# Altium PCB PCB1.PcbDoc
Units mil, origin at the board's own origin, x right, y up, seen from the top; angles counter-clockwise.
Board outline 1045 x 2725 mil, 4 copper layers (Top Layer, Int1 (GND), Int2 (PWR), Bottom Layer), stack 53.912 mil thick; 31 components, 28 nets, 146 pads, 555 vias.
Unrouted connection lines stored in the file: 30.
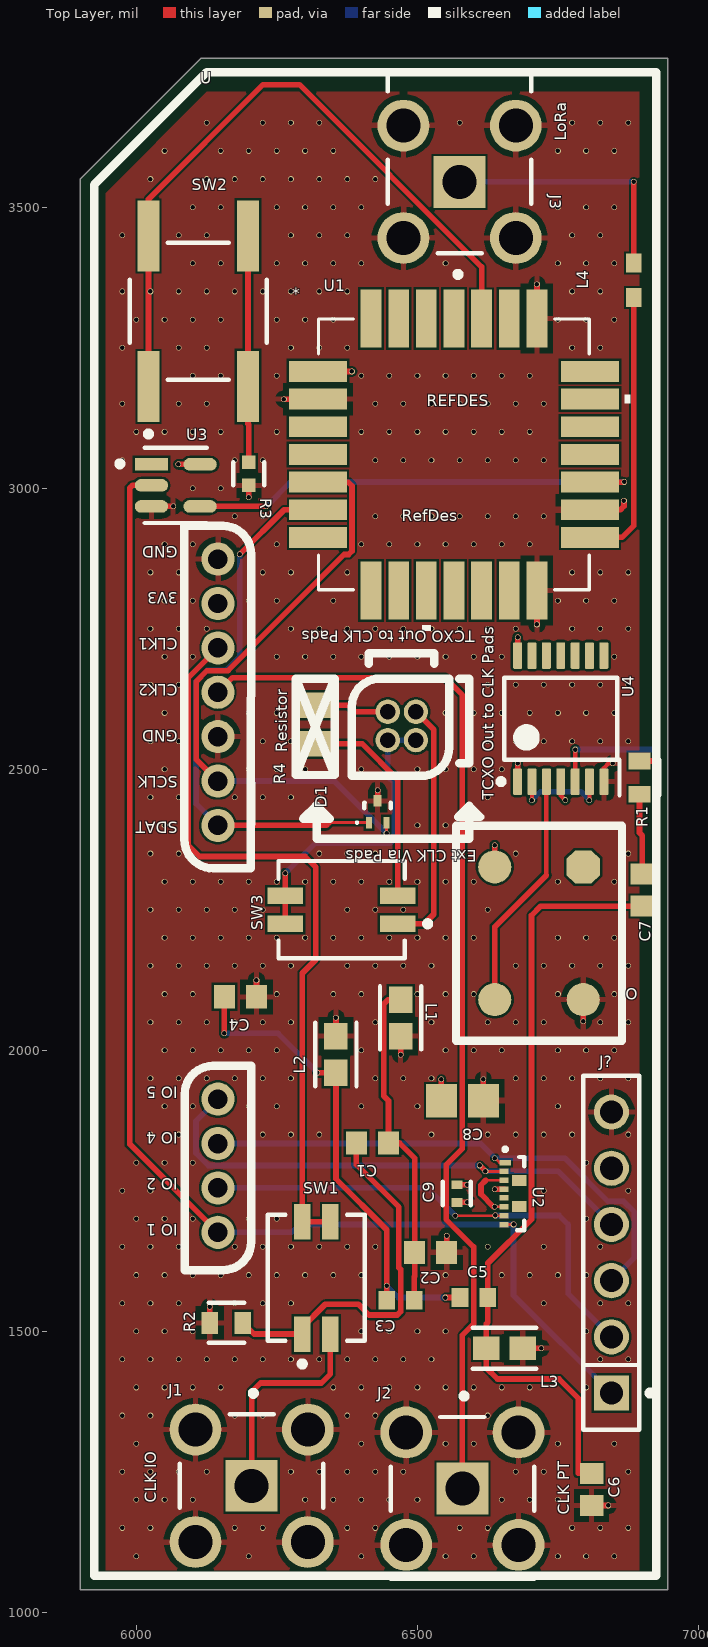
[diagram p0: Top Layer view]
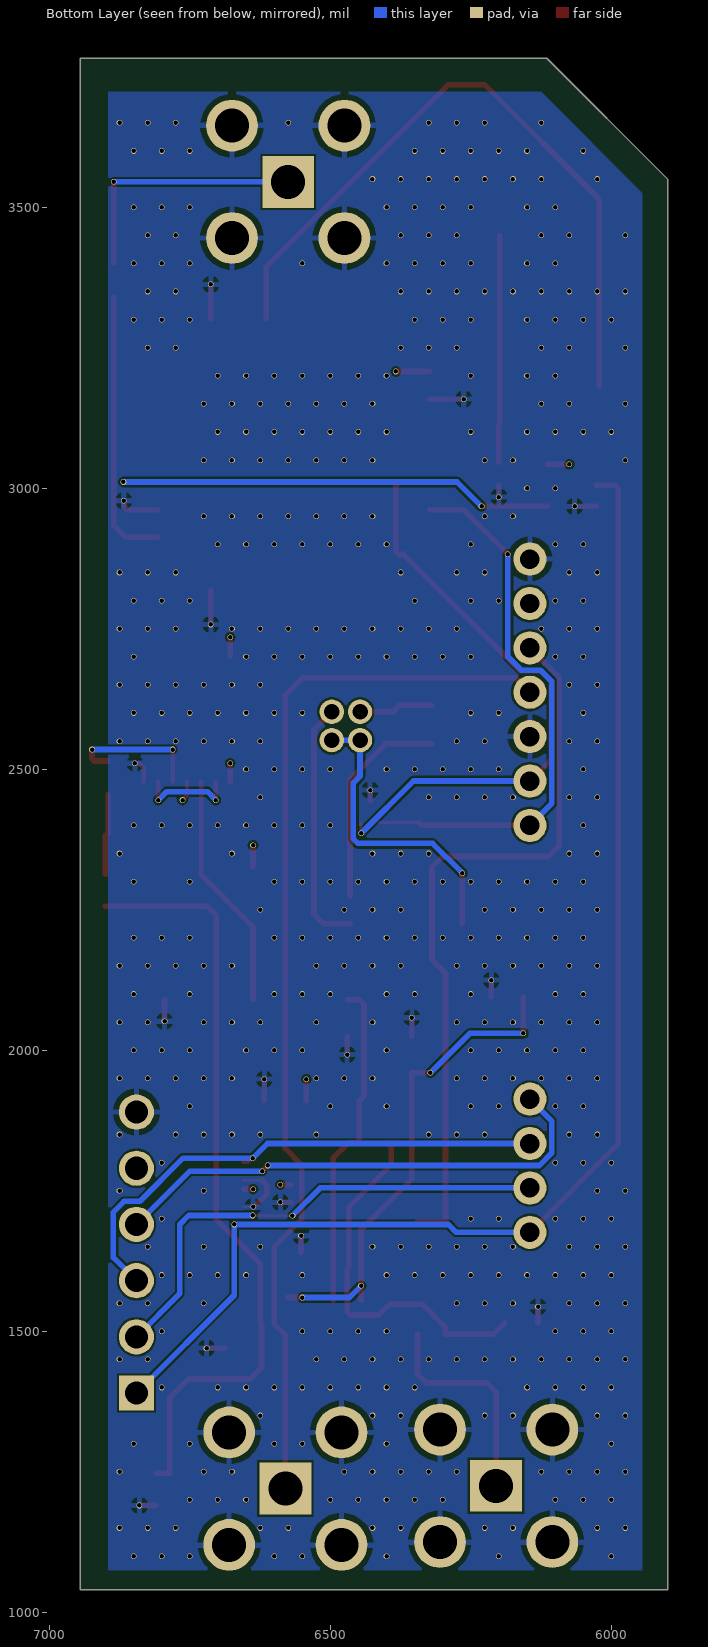
[diagram p1: Bottom Layer view, seen from below]
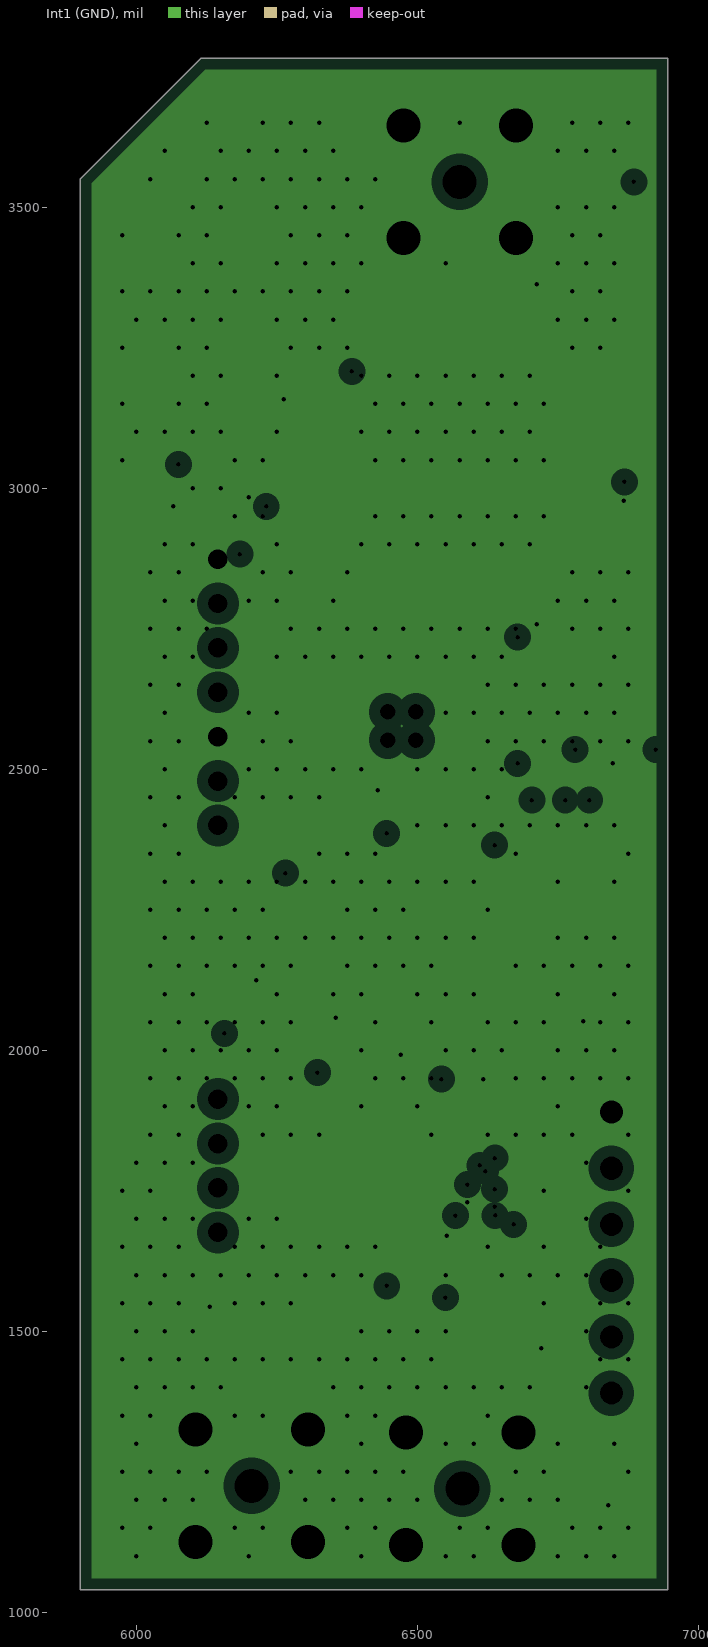
[diagram p2: Int1 (GND), clearances drawn from the general rule]
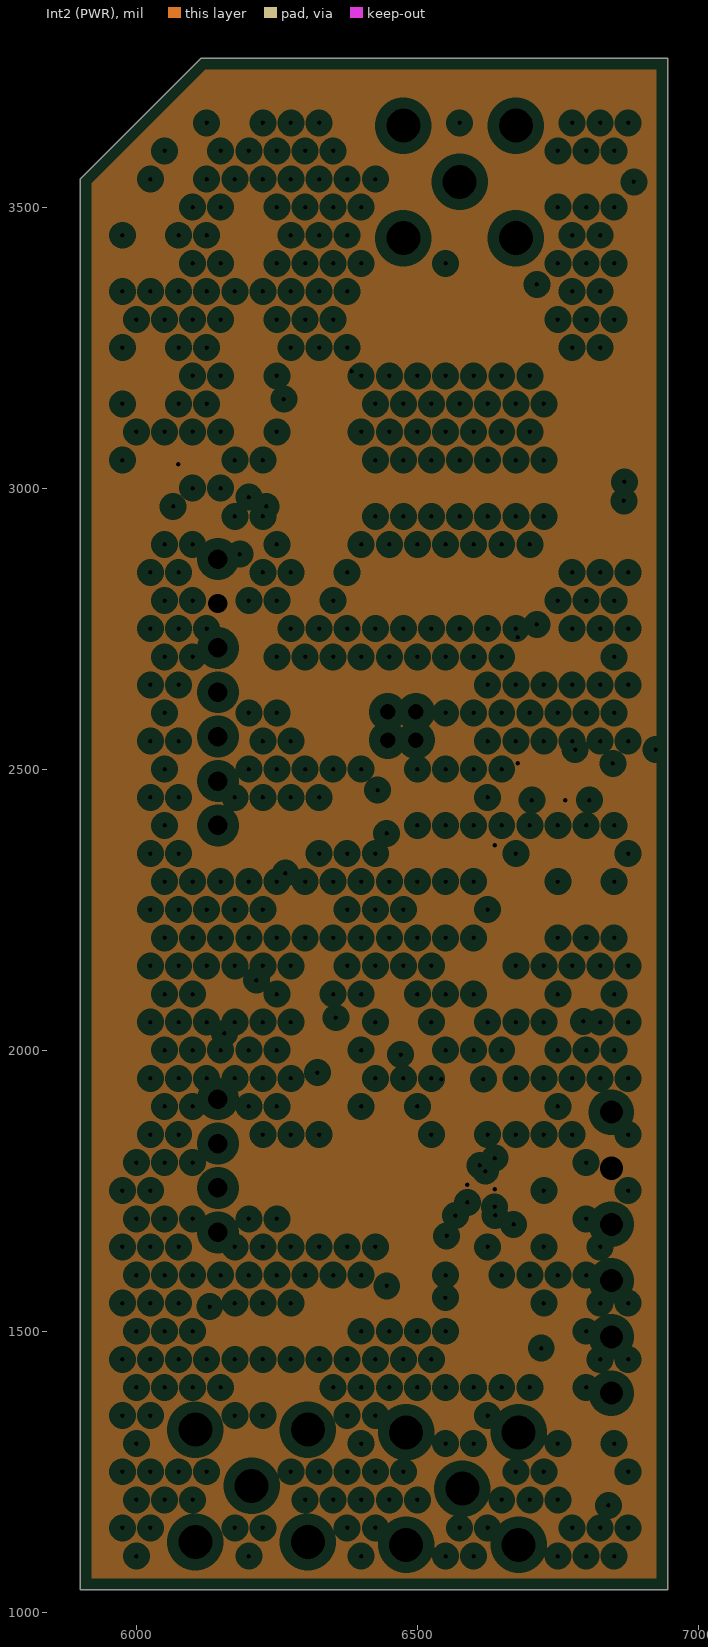
[diagram p3: Int2 (PWR), clearances drawn from the general rule]
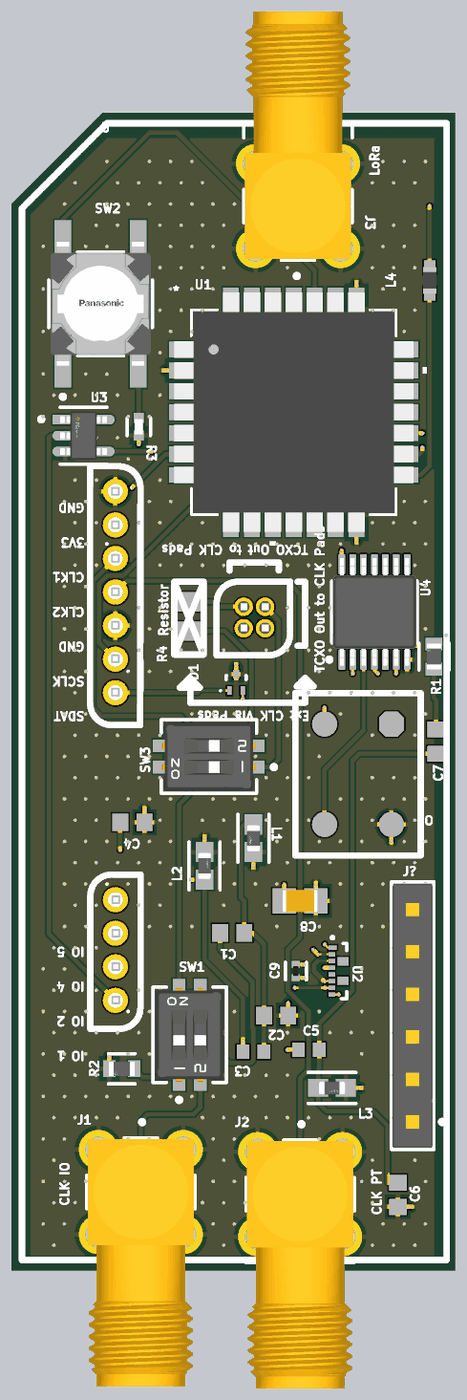
[diagram p4: 3D render of the assembled board from above, using the file's embedded part models]

## Layer stack, top to bottom
Top Solder: solder mask 1, SM-001, Dk 4
Top Layer: signal copper 1.378
Dielectric 1: prepreg 5.1, PP-017, Dk 4.3
Dielectric 2: prepreg 5.1, PP-017, Dk 4.3
Int1 (GND): plane copper 1.378, net GND
Dielectric 3: core 28, Core-039, Dk 4.8
Int2 (PWR): plane copper 1.378, net NetC8_2
Dielectric 4: prepreg 5.1, PP-017, Dk 4.3
Dielectric 5: prepreg 5.1, PP-017, Dk 4.3
Bottom Layer: signal copper 1.378
Bottom Solder: solder mask 1, SM-001, Dk 4

## Board outline
5900,1040 6945,1040 6945,3765 6115,3765 5900,3550

## Design rules (kind name [scope] priority, off if disabled: settings)
Clearance [All] p1: gap=4 ignorepadtopadclearanceinfootprint=TRUE
PlaneClearance [All] p1: clearance=20
PlaneConnect [All] p1: planeconnectstyle=Relief reliefexpansion=20 reliefentries=4 reliefconductorwidth=10 reliefairgap=10
PolygonConnect [All] p1: connectstyle=Relief reliefconductorwidth=10 reliefentries=4 polygonreliefangle="90 Angle" airgapwidth=10
RoutingVias [All] p1: holewidth=8 width=10 viastyle="Through Hole" minholewidth=8 minwidth=10 maxholewidth=8 maxwidth=10
SMDNeckDown [All] p1: percent=50.000
SolderMaskExpansion [All] p1: expansion=4 istentingtop=FALSE
SupplyNets "Schematic Supply Nets" [InNet('GND')] p1: voltage=0.000
Width [All] p1: maxlimit=10 minlimit=4 preferedwidth=10
28 further rules are at their usual default settings.

## Components (designator, comment, footprint, x,y, rotation, side; value= is the part's Value field where it differs from the comment)
C1 "GRM1885C1H470JA01D" CAPC1608X90X35ML10T15 6420,1835 r180 top
C2 "GRM1885C1H150JA01D" CAPC1608X90X35ML10T15 6523.54,1640 r180 top
C3 "GRM1885C1H100JA01D" CAPC1608X90X35LL10T15 6470,1555 r180 top
C4 "GRM1885C1H470JA01D" CAPC1608X90X35ML10T15 6185,2095 r180 top
C5 "GRM1885C1H100JA01D" CAPC1608X90X35LL10T15 6600.39,1560 r0 top
C6 "GRM1885C1H150JA01D" CAPC1608X90X35ML10T15 6810,1218.54 r90 top
C7 "GRM1885C1H470JA01D" CAPC1608X90X35ML10T15 6900,2285 r90 top
C8 "GRM21BR61C475KA88L" CAPC2013X135X45LL10T25 6580,1910 r180 top
C9 "GRM155R71C104KA88D" FP-GRM15-MFG 6570,1745 r90 top value=0.10μF
D1 "UESD3.3DT5G" ONSC-SOT-723-3-631AA-01_V 6429.25,2424.29 r90 top
J1 "CLK IO" FP-73391-0083-MFG 6205,1058.46 r90 top
J2 "CLK PT" FP-73391-0083-MFG 6580,1053.46 r90 top
J3 "LoRa" FP-73391-0083-MFG 6575,3711.54 r270 top
J? "SSW-106-02-F-S" FP-SSW-106-02-F-S-MFG 6845,1640 r90 top
L1 "LQM18NNR47K00D" FP-LQM18NN_00-IPC_A 6470,2057.51 r270 top
L2 "LQM18NNR47K00D" FP-LQM18NN_00-IPC_A 6355,1992.51 r90 top
L3 "LQM18NNR47K00D" FP-LQM18NN_00-IPC_A 6655,1470 r0 top
L4 "742792605" SMD-0603 6885,3370 r90 top
O "AOC97FAJC-19.2000T" AOC97FAJC-19.2000T 6568.62,2399.06 r270 top
R1 "CRCW060351R0FKEA" FP-CRCW0603-e3-MFG 6895,2485 r90 top
R2 "CRCW060351R0FKEA" FP-CRCW0603-e3-MFG 6160,1515 r180 top
R3 "CRCW0402470RFKED" FP-CRCW0402-e3-MFG 6200,3025.67 r270 top
R4 "ERJ-6GEY0R00V" RESC2013X70X40NL20T20 6320,2579.45 r270 top
SW1 "CHS-02TA" FP-CHS-02TA-MFG 6320,1595 r0 top
SW2 "EVQ-P1905M" FP-EVQ-P1905M-MFG 6110,3315 r0 top
SW3 "CHS-02TA" FP-CHS-02TA-MFG 6365,2250 r90 top
U "RTL-SDRV3" "RTLSDR V3" 6929.45,1038.94 r90 top locked
U1 "317990687" QFN_90687_SEE 6565,3060 r0 top
U2 "SZESD7016MUTAG" ONSC-UDFN-8-517CB_V 6670,1745 r270 top
U3 "SN74LV1T34DBVR" FP-DBV0005A-IPC_B 6070,3005 r0 top
U4 "SN74AC74PWR" PW0014A_L 6755,2590 r90 top

## Footprints (in the part's own frame and the unit in brackets; to place one, negate y for a bottom-side part, rotate by r counter-clockwise, add the part's x,y. Pads: shape width x height; smd on the part's side, far side on the other; paste and mask are expansions set on the pad)
AOC97FAJC-19.2000T [mm]
  oct 1.5x1.5 smd: 1(1.85,5.75)
  round 1.5 smd: 2(7.85,5.75) 3(7.85,1.75) 4(1.85,1.75)
  silkscreen extent 0,0 9.7,7.5, body extent 0,0 9.67,7.47, height 3.9
CAPC1608X90X35LL10T15 [mm] "Chip Capacitor, 2-Leads, Body 1.60x0.80mm, IPC High Density"
  rect 0.75x0.85 smd: 1(-0.625,0) 2(0.625,0)
  body extent -0.85,-0.45 0.85,0.45, height 0.9
CAPC1608X90X35ML10T15 [mm] "Chip Capacitor, 2-Leads, Body 1.60x0.80mm, IPC Low Density"
  rect 0.95x1.05 smd: 1(-0.725,0) 2(0.725,0)
  body extent -0.85,-0.45 0.85,0.45, height 0.9
CAPC2013X135X45LL10T25 [mm] "Chip Capacitor, 2-Leads, Body 2.10x1.35mm, IPC High Density"
  rect 1.4x1.5 smd: 1(-0.95,0) 2(0.95,0)
  body extent -1.05,-0.67 1.05,0.67, height 1.35
FP-73391-0083-MFG [mm]
  rect 2.34x2.34 hole 1.54 paste-2539.97 mask+0: 1(4.23,0)
  round 2.34 hole 1.54 paste-2539.97 mask+0: 2(1.69,2.54) 3(6.77,2.54) 4(1.69,-2.54) 5(6.77,-2.54)
  silkscreen extent 0.15,-3.24 8.53,3.24, body extent -7.56,-3.81 8.04,3.81, height 0.25
FP-CHS-02TA-MFG [mm]
  rect 0.76x1.6 smd paste+0 mask+0: 1(-0.635,-2.54) 2(0.635,-2.54) 3(0.635,2.54) 4(-0.635,2.54)
  silkscreen extent -2.2,-4.01 2.2,2.85, body extent -2.3,-3.44 2.3,3.44, height 0.25
FP-CRCW0402-e3-MFG [mm]
  rect 0.6x0.6 smd paste+0 mask+0: 1(-0.525,0) 2(0.525,0)
  silkscreen extent -0.52,-0.7 0.53,0.7, body extent -0.92,-0.4 0.92,0.4, height 0.25
FP-CRCW0603-e3-MFG [mm]
  rect 0.75x1 smd paste+0 mask+0: 1(-0.75,0) 2(0.75,0)
  silkscreen extent -0.8,-0.9 0.8,0.9, body extent -1.22,-0.6 1.22,0.6, height 0.25
FP-DBV0005A-IPC_B [mm]
  rect 1.505x0.572 smd paste+0 mask+0: 1(-1.1,0.95)
  rrect100% 1.505x0.572 smd paste+0 mask+0: 2(-1.1,0) 3(-1.1,-0.95) 4(1.1,-0.95) 5(1.1,0.95)
  silkscreen extent -2.65,-1.7 1.4,1.7, body extent -2.1,-1.7 2.1,1.7, height 0.25
FP-EVQ-P1905M-MFG [mm]
  rect 1x3.2 smd paste+0 mask+0: A(-2.25,-3.4) A'(-2.25,3.4) B(2.25,-3.4) B'(2.25,3.4)
  silkscreen extent -3.1,-5.67 3.1,3.1, body extent -3.2,-5.1 3.2,5.1, height 0.25
FP-GRM15-MFG [mm]
  rect 0.4x0.5 smd paste+0 mask+0: 1(-0.4,0) 2(0.4,0)
  silkscreen extent -0.53,-0.62 0.53,0.62, body extent -0.7,-0.38 0.7,0.38, height 0.25
FP-LQM18NN_00-IPC_A [mil]
  rect 47.5x41.66 smd paste+0 mask+0: 1(-32.51,0) 2(32.51,0)
  silkscreen extent -56,-37 56,37, body extent -76,-41 76,41, height 10
FP-SSW-106-02-F-S-MFG [mm]
  rect 1.59x1.59 hole 1.04 paste-2539.97 mask+0: 1(-6.35,0)
  round 1.59 hole 1.04 paste-2539.97 mask+0: 2(-3.81,0) 3(-1.27,0) 4(1.27,0) 5(3.81,0) 6(6.35,0)
  silkscreen extent -8,-1.88 8,1.27, body extent -8.1,-1.37 8.1,1.37, height 0.25
ONSC-SOT-723-3-631AA-01_V [mm] "SOT223, 3-Leads, Body 1.2x0.8mm, Pitch 0.4mm"
  rect 0.52x0.27 smd: 1(-0.49,0.4) 2(-0.49,-0.4)
  rect 0.52x0.36 smd: 3(0.49,0)
  silkscreen extent -0.54,-0.6 0.4,0.98, body extent -0.4,-0.6 0.4,0.6, height 0.55
ONSC-UDFN-8-517CB_V [mm] "SON, 8-Leads, Body 3.3x1mm, Pitch 0.4mm"
  rect 0.25x0.5 smd: 1(-1.4,-0.35)
  rect 0.25x0.4 smd: 2(-1,-0.4) 3(-0.6,-0.4) 4(-0.2,-0.4) 5(0.2,-0.4) 6(0.6,-0.4) 7(1,-0.4) 8(1.4,-0.4)
  rect 0.5x0.65 smd: 9(0.58,0.275) 10(-0.58,0.275)
  silkscreen extent -2.05,-0.4 1.65,0.5, body extent -1.65,-0.5 1.65,0.5, height 0.55
PW0014A_L [mm] "SOP, 14-Leads, Body 5.1x4.5mm, Pitch 0.65mm, IPC High Density"
  rrect25% 1.2x0.4 smd: 1(-2.85,1.95) 2(-2.85,1.3) 3(-2.85,0.65) 4(-2.85,0) 5(-2.85,-0.65) 6(-2.85,-1.3) 7(-2.85,-1.95) 8(2.85,-1.95) 9(2.85,-1.3) 10(2.85,-0.65) 11(2.85,0) 12(2.85,0.65) 13(2.85,1.3) 14(2.85,1.95)
  silkscreen extent -2.97,-2.55 1.85,2.82, body extent -3.21,-2.5 3.21,2.5, height 1
QFN_90687_SEE [mil]
  rect 103x37 smd paste+0 mask+0: 1(-242,147.64) 2(-242,98.43) 3(-242,49.21) 4(-242,0) 5(-242,-49.21) 6(-242,-98.42) 7(-242,-147.64) 15(242,-147.64) 16(242,-98.42) 17(242,-49.21) 18(242,0) 19(242,49.21) 20(242,98.43) 21(242,147.64)
  rect 37x103 smd paste+0 mask+0: 8(-147.64,-242) 9(-98.43,-242) 10(-49.21,-242) 11(0,-242) 12(49.21,-242) 13(98.43,-242) 14(147.64,-242) 22(147.64,242) 23(98.43,242) 24(49.21,242) 25(0,242) 26(-49.21,242) 27(-98.43,242) 28(-147.64,242)
  silkscreen extent -241,-314 314,241, body extent -281,-281 281,281, height 98
RESC2013X70X40NL20T20 [mm] "Chip Resistor, 2-Leads, Body 2.00x1.25mm, IPC Medium Density"
  rect 1.15x1.45 smd: 1(-0.875,0) 2(0.875,0)
  body extent -1.1,-0.72 1.1,0.72, height 0.7
"RTLSDR V3" [mm] "Untested, Should work fine. Use headers with a clearance of at least 6.38 mm to go past the Capacitor and USB port."
  round 1.1 hole 0.7: 1(38.425,10.975) 2(38.425,12.25) 3(39.706,12.25) 4(39.706,10.975)
  round 1.5 hole 0.88: 5(46.606,19.925) 6(44.6,19.925) 7(42.594,19.925) 8(40.588,19.925) 9(38.582,19.925) 10(36.576,19.925) 11(34.57,19.925) 12(22.2,19.925) 13(20.194,19.925) 14(18.188,19.925) 15(16.182,19.925)
  silkscreen extent 0.66,0.11 68.61,25.51, body extent 15.2,9.89 47.61,20.93, height 6.32
SMD-0603 [mm] "Chip Inductor, 2-Leads, Body 1.6x0.8mm"
  rect 0.85x0.7 smd: 1(-0.775,0) 2(0.775,0)
  body extent -0.8,-0.4 0.8,0.4, height 0.79

## Part data
C1 C4 C7: library part CMP-2006-02672-1, Manufacturer=Murata, Part Number=GRM1885C1H470JA01D
C2 C6: library part CMP-2006-02610-1, Manufacturer=Murata, Part Number=GRM1885C1H150JA01D
C3 C5: library part CMP-2006-02592-1, Manufacturer=Murata, Part Number=GRM1885C1H100JA01D
C8: library part CMP-1662-00015-2, "Chip Capacitor, 4.7 uF, +/- 10%, 16 V, -55 to 85 degC, 0805 (2012 Metric), RoHS, Tape and Reel", Capacitance="4.7 uF", Case Code (Imperial)=0805, Case Code (Metric)=2012, Max Operating Temperature="85 degC", Min Operating Temperature="-55 degC", Package Quantity=3000, Tolerance=10%, Type (Capacitors)=X5R, Voltage Rating="16 V", Case\/Package=0805, ComponentLink1Description="Manufacturer URL", ComponentLink1URL=http://www.murata.com/, ComponentLink2Description=Datasheet, ComponentLink2URL=http://search.murata.co.jp/Ceramy/image/img/A01X/G101/ENG/GRM21BR61C475KA88-01.pdf, DatasheetVersion=03/2016, Height="1.25 mm", Length="2 mm", Mount="Surface Mount", Mounting Technology="Surface Mount", PackageDescription="2-Pin Surface Mount Device, Body 2 x 1.25 mm", PackageReference=0805, Packaging="Tape and Reel", PartNumber=GRM21BR61C475KA88L, Pins=2, Radiation Hardening=No, REACH SVHC="No SVHC", RoHSCompliant=true, Voltage Rating (DC)="16 V", Width="1.25 mm"
C9: library part CMP-2100-03641-2, "CAP CER 0.1UF 16V X7R 0402", Capacitance=0.10μF, Manufacturer=Murata, Package=GRM15, Temperature="-55°C to +125°C", Temperature Characteristic=X7R, Temperature Range High=+125°C, Temperature Range Low=-55°C, Tolerance=10%, Voltage Rating=16Vdc, Category=Cap, ComponentLink2Description=Datasheet, ComponentLink2URL=https://search.murata.co.jp/Ceramy/image/img/A01X/G101/ENG/GRM155R71H471KA01-01A.pdf, Device Class L1="Passive Components", Device Class L2=Capacitors, Device Class L3="Ceramic Capacitors", Digikey Description="CAP CER 0.1UF 16V X7R 0402", Height=0.55mm, Ipc Land Pattern Name=CAPC10050X219, Lead Free=yes, Manufacturer Part Number=GRM155R71C104KA88D, Material=Ceramic, Mouser Description="0402 0.1 uF 16V ±10 % Tolerance X7R SMT Multilayer Ceramic Capacitor", Octopart=https://octopart.com/grm155r71c104ka88d-murata-196880, RoHS=TRUE, Standoff Height=0mm
D1: library part CMP-1063-00209-1, "ESD Protection Diode, 3-Pin SOT-723, Pb-Free, Tape and Reel", Manufacturer="On Semiconductor", ComponentLink1Description="Manufacturer URL", ComponentLink1URL=http://www.onsemi.com/, ComponentLink2Description=Datasheet, ComponentLink2URL=http://www.onsemi.cn/pub_link/Collateral/UESD3.3DT5G-D.PDF, ComponentLink3Description="Package Specification", ComponentLink3URL=http://www.onsemi.com/pub_link/Collateral/631AA.PDF, DatasheetVersion="Rev. 4", Direction=Unidirectional, IR Max (uA)=1, Mounting Technology="Surface Mount", Number of Lines=2, PackageDescription="3-Pin Small Outline Transistor, Body 1.2 x 0.8 mm, Pitch 0.4 mm", PackageReference=SOT-723-3-631AA-01, PackageVersion="Rev. D, 08/2009", Packing="Tape and Reel", PartNumber=UESD3.3DT5G, RoHS=Pb-Free, V(BR) Min (V)=5, VRWM Max (V)=3.3
J1 J2 J3: library part CMP-04764-000017-1, "SMA RA JACK, PCB", Case/Package=SMA, Body Plating=Gold, Connector Type=SMA, Contact Material=Copper, Contact Plating=Gold, Gender=Female, Impedance=50R, Mount=PCB, Orientation="Right Angle", REACH SVHC="No SVHC", RoHS Compliant=Yes, Termination=Solder
J?: library part CMP-1023-00361-2, "CONN RCPT 6POS 0.1 GOLD PCB", Color=Black, Contact Resistance=10mR, Max Current Rating=6.9A, Max Operating Temperature=125°C, Max Voltage Rating (AC)=550V, Min Operating Temperature=-55°C, Contact Material=Bronze, Contact Plating=Gold, Depth=2.41mm, Gender=Female, Housing Color=Black, Housing Material=Polymer, Length=15.75mm, Mating Cycles=100, Number of Contacts=6, Number of Rows=1, Orientation=Vertical, Packaging=Bulk, Pitch=2.54mm, Radiation Hardening=No, RoHS Compliant=Yes, Termination=Solder
L1 L2 L3: library part CMP-06042-017008-1, "Multilayer Type Inductor for General Circuits, 0603 (1608), 470nH, 10%, 1.35Ω, 35mA", Case Code (Imperial)=0603, Case Code (Metric)=1608, Current Rating=35mA, DC Resistance (DCR)=1.35R, Inductance=470nH, Inductance Tolerance=10%, Max Operating Temperature=85°C, Min Operating Temperature=-40°C, Package Quantity=4000, Self Resonant Frequency=105MHz, Test Frequency=25MHz, Case/Package=0603, Core Material=Ferrite, DC Current=35mA, Depth=0.95mm, Height=0.8mm, Height - Seated (Max)=0.035inch, Lead Free="Lead Free", Length=1.6mm, Max DC Current=35mA, Military Standard=Not, Mount="Surface Mount", Packaging="Tape and Reel", Q Factor=15, Radiation Hardening=No, REACH SVHC="No SVHC", Series=LQM18N, Shielding=Shielded, Termination=SMD/SMT, Tolerance=10%, Width=0.031inch
L4: library part CMP-0220-00183-1, "SMD EMI Suppression Ferrite Bead WE-CBF, Z = 33 Ohm", ComponentLink1Description="Manufacturer Link", ComponentLink1URL=http://www.we-online.com, ComponentLink2Description=Datasheet, ComponentLink2URL=http://www.we-online.de/katalog/media/pdf/742792605.pdf, DatasheetVersion=Dec-2005, Impedance="15 Ohm", PackageDescription="Chip Inductor, 2-Leads, Body 1.6 x 0.8 mm", PackageReference=SMD-0603, PackageVersion=2009
R1 R2: library part CMP-2000-03446-2, "RES Thick Film, 51Ω, 1%, 0.1W, 100ppm/°C, 0603", Case Code (Imperial)=0603, Case Code (Metric)=1608, Max Operating Temperature=155°C, Max Power Dissipation=100mW, Min Operating Temperature=-55°C, Package Quantity=10, Resistance=51R, Temperature Coefficient=100ppm/°C, Tolerance=1%, Voltage Rating=75V, Case/Package=0603, Composition="Thick Film", Contact Plating=Tin, Depth=0.85mm, Features="Automotive AEC-Q200", Height=0.45mm, Lead Free="Lead Free", Length=1.55mm, Military Standard=Not, Number of Pins=2, Number of Terminations=2, Packaging="Tape and Reel", Power Rating=100mW, Radiation Hardening=No, Termination=SMD/SMT, Voltage Rating (DC)=75V, Weight=7.1E-05oz, Width=0.85mm, Working Voltage=75V
R3: library part CMP-2002-00022-2, "RES Thick Film, 470Ω, 1%, 0.063W, 100ppm/°C, 0402", Case Code (Imperial)=0402, Case Code (Metric)=1005, Max Operating Temperature=155°C, Max Power Dissipation=63mW, Min Operating Temperature=-55°C, Package Quantity=10, Resistance=470R, Temperature Coefficient=100ppm/°C, Tolerance=1%, Voltage Rating=50V, Case/Package=0402, Composition="Thick Film", Contact Plating=Tin, Depth=0.5mm, Features="Automotive AEC-Q200", Height=0.35mm, Lead Free="Lead Free", Length=1mm, Military Standard=Not, Mount="Surface Mount", Number of Terminations=2, Packaging="Tape and Reel", Power Rating=63mW, Radiation Hardening=No, Termination=SMD/SMT, Voltage Rating (DC)=50V, Weight=2.3E-05oz, Width=0.5mm
R4: library part CMP-1665-00002-5, "Chip Resistor, 0 Ohm, +/- 1%, 0.125 W, -55 to 155 degC, 0805 (2012 Metric), RoHS, Tape and Reel", Case Code (Imperial)=0805, Case Code (Metric)=2012, Max Operating Temperature="155 degC", Min Operating Temperature="-55 degC", Package Quantity=5000, Resistance="0 Ohm", Tolerance=5%, Case/Package=0805, ComponentLink1Description="Manufacturer URL", ComponentLink1URL=http://www.panasonic.com/, ComponentLink2Description=Datasheet, ComponentLink2URL=http://industrial.panasonic.com/cdbs/www-data/pdf/RDA0000/AOA0000C84.pdf, DatasheetVersion=03/2015, Height="0.6 mm", Length="2 mm", Mounting Technology="Surface Mount", PackageDescription="2-Pin Surface Mount Device, Body 2 x 1.25 mm", Packaging="Tape and Reel", PartNumber=ERJ-6GEY0R00V, Radiation Hardening=No, REACH SVHC="No SVHC", RoHSCompliant=True, Width="1.25 mm"
SW1 SW3: library part CMP-71745-000006-1, "SWITCH SLIDE DIP SPST 100MA 6V", Current Rating=100mA, Max Operating Temperature=85°C, Max Voltage Rating (DC)=24V, Min Operating Temperature=-40°C, Voltage Rating (DC)=6V, Actuator Type="Slide (Standard)", Body Material=Polyphenylene, Contact Material="Copper Alloy", Contact Plating=Gold, Electrical Life=2000Cycles, Lead Free="Lead Free", Length=0.161inch, Mount="Surface Mount", Number of Positions=2, Orientation=Vertical, Packaging="Tape and Reel", Pitch=0.05inch, RoHS Compliant=Yes, Series=CHS, Termination=J-Hook, Throw Configuration=SPST, Washable=Yes
SW2: library part CMP-05618-000070-1, "SWITCH TACTILE SPST-NO 0.05A 12V", Actuator Color=Natural, Case/Package=SMD/SMT, Contact Resistance=100mR, Current Rating=50mA, Max Operating Temperature=85°C, Max Voltage Rating (DC)=12V, Min Operating Temperature=-40°C, Operating Force=1.6N, Package Quantity=2000, Actuator Length=1.5mm, Actuator Type=Standard, Contact Plating=Gold, Electrical Life=100000Cycles, Illumination Type=Non-Illuminated, Lead Free="Lead Free", Mechanical Life=100000Cycles, Mount="Surface Mount", Orientation=Straight, Packaging="Tape and Reel", Radiation Hardening=No, REACH SVHC="No SVHC", RoHS Compliant=Yes, Series=EVQP1, Size=6.1mm, Switch Function=Off-Mom, Switch Travel=1.3mm, Termination=J-Bend, Throw Configuration=SPST, Voltage Rating (DC)=12V
U: library part RTL-SDR
U1: "No Description Available", Manufacturer_Name=BeagleBoard, Copyright="Copyright (C) 2025 Ultra Librarian. All rights reserved.", Manufacturer_Part_Number=317990687, RefDes=RefDes, Type=Type
U2: library part CMP-1063-00262-1, "Low Capacitance ESD Protection USB3.0, 8-Pin UDFN, Pb-Free, Tape and Reel", Manufacturer="On Semiconductor", ComponentLink1Description="Manufacturer URL", ComponentLink1URL=http://www.onsemi.com/, ComponentLink2Description=Datasheet, ComponentLink2URL=http://www.onsemi.com/pub_link/Collateral/ESD7016-D.PDF, ComponentLink3Description="Package Specification", ComponentLink3URL=http://www.onsemi.com/pub_link/Collateral/517CB.PDF, DatasheetVersion="Rev. 3", Direction=Bidirectional, IR Max (uA)=1, Mounting Technology="Surface Mount", Number of Lines=6, PackageDescription="8-Pin Small Outline No-Lead, Body 3.3 x 1 mm, Pitch 0.4 mm", PackageReference=UDFN-8-517CB, PackageVersion="Rev. O, 09/2011", Packing="Tape and Reel", PartNumber=SZESD7016MUTAG, RoHS=Pb-Free, V(BR) Min (V)=5.5, VRWM Max (V)=5
U3: library part CMP-0859-00123-4, "IC BUF NON-INVERT 5.5V SOT23-5", Case/Package=SOT-23-5, High Level Output Current=-8mA, Low Level Output Current=8mA, Max Operating Temperature=125°C, Max Supply Voltage=5.5V, Min Operating Temperature=-40°C, Min Supply Voltage=1.6V, Package Quantity=3000, Quiescent Current=1uA, Lead Free="Lead Free", Logic Function=Buffer, Mount="Surface Mount", Number of Bits=1, Number of Bits per Element=1, Number of Channels=1, Number of Elements=1, Number of Input Lines=1, Number of Inputs=1, Number of Output Lines=1, Number of Outputs=1, Number of Pins=5, Operating Supply Current=8mA, Packaging="Tape and Reel", Polarity=Non-Inverting, Propagation Delay=15.5ns, Radiation Hardening=No, REACH SVHC="No SVHC", Weight=0.000353oz
U4: library part CMP-1619-00914-2, "Dual Positive-Edge-Triggered D-Type Flip-Flops With Clear and Preset, PW0014A, LARGE T&R", F @ Nom Voltage(Max)(Mhz)=100, Generic Part Number=SN74AC74, ICC @ Nom Voltage(Max)(mA)=0.02, Manufacturer="Texas Instruments", Operating Temperature Range(C)="-40 to 85", Rating=Catalog, tpd @ Nom Voltage(Max)(ns)=13.5,10.5, Voltage(Nom)(V)=3.3,5, 3-State Output=No, Bits(#)=2, Code_JEDEC=MO-153, DatasheetVersion=SCAS521F, Input Type=CMOS, Output=3S, Output Drive (IOL/IOH)(Max)(mA)=24/-24, Output Logic=Inverted,Non-inverted, Output Type=CMOS, PackageReference=PW0014A, Schmitt Trigger=No, Technology Family=AC, VCC(Max)(V)=6, VCC(Min)(V)=2

## Via types
v1: diameter 10, hole 8, Top Layer to Bottom Layer, tented both sides, 507 vias
v2: diameter 10, hole 8, Top Layer to Bottom Layer, 48 vias

## Nets (pads, with @x,y where several pads share a name; then routed paths per layer and width w, separated by ;. In a path a pad name is that pad's centre, name@x,y a point inside that pad or via, vN(x,y) a via of type N, cw(c..) or ccw(c..) an arc to the next point about the centre after c; other vN are vias at no path point)
GND: C2.1 C4.1 C6.1 C8.1 C9.1 D1.3 J1.2 J1.3 J1.4 J1.5 J2.2 J2.3 J2.4 J2.5 J3.2 J3.3 J3.4 J3.5 J?.6 L1.2 L2.2 L3.2 O.2 R2.2 R3.2 U1.2 U1.14 U1.16 U1.22 U2.3 U2.6 U3.3 U4.7 U.5 U.9 | length 800
  Top Layer w4.92: 6621.62,1768.62 U2.3 ; v2@6635.62,1721.38 v2(6637.38,1721.38) U2.6
  Top Layer w7.87: U4.7 6831.77,2502.19 6840,2510.42 v2(6847.77,2510.42)
  Top Layer w10: U3.3 v2(6065.31,2967.6) ; R2.2 v2(6130.47,1543.69) ; v2(6200,2984.19) R3.2 ; C4.1 v2(6213.54,2124.67) ; v2(6262.5,3158.43) U1.2 ; L2.2 v2(6355,2057.78) ; D1.3 v2(6429.25,2462.82) ; v2(6470,1992.25) L1.2 ; C2.1 v2(6552.09,1669.67) ; C9.1 v2(6588.84,1729.25) ; C8.1 v2(6617.4,1948.53) ; 6621.62,1768.62 6613,1760 6613,1744 v2@6635.62,1721.38 ; L3.2 v2(6720.27,1470) ; v2(6712.64,2757.5) U1.14 ; U1.22 v2(6712.64,3362.5) ; v2(6795,2051.47) O.2 ; U1.16 6861.08,2961.58 6867.5,2968 v2(6867.5,2977.58) ; C6.1 v2(6839.67,1190)
  other v1: 6000,1100 6200,1100 6400,1100 6550,1100 6600,1100 6750,1100 6800,1100 6850,1100 5975,1150 6025,1150 6175,1150 6225,1150 6375,1150 6425,1150 6575,1150 6625,1150 6775,1150 6825,1150 6875,1150 6000,1200 6050,1200 6100,1200 6300,1200 6350,1200 6400,1200 6450,1200 6500,1200 6650,1200 6700,1200 6750,1200 5975,1250 6025,1250 6075,1250 6125,1250 6275,1250 6325,1250 6375,1250 6425,1250 6475,1250 6675,1250 6725,1250 6875,1250 6000,1300 6400,1300 6550,1300 6600,1300 6750,1300 6850,1300 5975,1350 6025,1350 6175,1350 6225,1350 6375,1350 6425,1350 6625,1350 6000,1400 6050,1400 6100,1400 6150,1400 6350,1400 6400,1400 6450,1400 6500,1400 6550,1400 6600,1400 6650,1400 6700,1400 6800,1400 5975,1450 6025,1450 6075,1450 6125,1450 6175,1450 6225,1450 6275,1450 6325,1450 6375,1450 6425,1450 6475,1450 6525,1450 6825,1450 6875,1450 6000,1500 6050,1500 6100,1500 6400,1500 6450,1500 6500,1500 6550,1500 6800,1500 5975,1550 6025,1550 6075,1550 6175,1550 6225,1550 6275,1550 6725,1550 6825,1550 6875,1550 6000,1600 6050,1600 6100,1600 6150,1600 6200,1600 6250,1600 6300,1600 6350,1600 6400,1600 6550,1600 6650,1600 6700,1600 6750,1600 6800,1600 5975,1650 6025,1650 6075,1650 6175,1650 6225,1650 6275,1650 6325,1650 6375,1650 6425,1650 6625,1650 6725,1650 6825,1650 6000,1700 6050,1700 6100,1700 6200,1700 6250,1700 6800,1700 5975,1750 6025,1750 6725,1750 6875,1750 6000,1800 6050,1800 6100,1800 6800,1800 6025,1850 6075,1850 6225,1850 6275,1850 6325,1850 6525,1850 6625,1850 6675,1850 6725,1850 6775,1850 6875,1850 6050,1900 6100,1900 6200,1900 6250,1900 6400,1900 6500,1900 6750,1900 6025,1950 6075,1950 6125,1950 6175,1950 6225,1950 6275,1950 6425,1950 6475,1950 6525,1950 6675,1950 6725,1950 6775,1950 6825,1950 6875,1950 6050,2000 6100,2000 6150,2000 6200,2000 6250,2000 6400,2000 6550,2000 6600,2000 6650,2000 6750,2000 6800,2000 6850,2000 6025,2050 6075,2050 6125,2050 6175,2050 6225,2050 6275,2050 6425,2050 6525,2050 6625,2050 6675,2050 6725,2050 6825,2050 6875,2050 6050,2100 6100,2100 6250,2100 6350,2100 6400,2100 6500,2100 6550,2100 6600,2100 6750,2100 6850,2100 6025,2150 6075,2150 6125,2150 6175,2150 6225,2150 6275,2150 6375,2150 6425,2150 6475,2150 6525,2150 6675,2150 6725,2150 6775,2150 6825,2150 6875,2150 6050,2200 6100,2200 6150,2200 6200,2200 6250,2200 6300,2200 6350,2200 6400,2200 6450,2200 6500,2200 6550,2200 6600,2200 6750,2200 6800,2200 6850,2200 6025,2250 6075,2250 6125,2250 6175,2250 6225,2250 6375,2250 6425,2250 6475,2250 6625,2250 6050,2300 6100,2300 6150,2300 6200,2300 6250,2300 6300,2300 6350,2300 6400,2300 6450,2300 6500,2300 6550,2300 6600,2300 6750,2300 6850,2300 6025,2350 6075,2350 6325,2350 6375,2350 6425,2350 6675,2350 6875,2350 6050,2400 6500,2400 6550,2400 6600,2400 6650,2400 6700,2400 6750,2400 6800,2400 6850,2400 6025,2450 6075,2450 6175,2450 6225,2450 6275,2450 6325,2450 6625,2450 6050,2500 6200,2500 6250,2500 6300,2500 6350,2500 6400,2500 6500,2500 6550,2500 6600,2500 6650,2500 6025,2550 6075,2550 6225,2550 6275,2550 6625,2550 6675,2550 6725,2550 6775,2550 6825,2550 6875,2550 6050,2600 6200,2600 6250,2600 6550,2600 6600,2600 6650,2600 6700,2600 6750,2600 6800,2600 6850,2600 6025,2650 6075,2650 6625,2650 6675,2650 6725,2650 6775,2650 6825,2650 6875,2650 6050,2700 6100,2700 6250,2700 6300,2700 6350,2700 6400,2700 6450,2700 6500,2700 6550,2700 6600,2700 6650,2700 6850,2700 6025,2750 6075,2750 6125,2750 6275,2750 6325,2750 6375,2750 6425,2750 6475,2750 6525,2750 6575,2750 6625,2750 6675,2750 6775,2750 6825,2750 6875,2750 6050,2800 6100,2800 6200,2800 6250,2800 6350,2800 6750,2800 6800,2800 6850,2800 6025,2850 6075,2850 6225,2850 6275,2850 6375,2850 6775,2850 6825,2850 6875,2850 6050,2900 6100,2900 6250,2900 6400,2900 6450,2900 6500,2900 6550,2900 6600,2900 6650,2900 6700,2900 6175,2950 6225,2950 6425,2950 6475,2950 6525,2950 6575,2950 6625,2950 6675,2950 6725,2950 6100,3000 6150,3000 5975,3050 6175,3050 6225,3050 6425,3050 6475,3050 6525,3050 6575,3050 6625,3050 6675,3050 6725,3050 6000,3100 6050,3100 6100,3100 6150,3100 6250,3100 6400,3100 6450,3100 6500,3100 6550,3100 6600,3100 6650,3100 6700,3100 5975,3150 6075,3150 6125,3150 6425,3150 6475,3150 6525,3150 6575,3150 6625,3150 6675,3150 6725,3150 6100,3200 6150,3200 6250,3200 6400,3200 6450,3200 6500,3200 6550,3200 6600,3200 6650,3200 6700,3200 5975,3250 6075,3250 6125,3250 6275,3250 6325,3250 6375,3250 6775,3250 6825,3250 6000,3300 6050,3300 6100,3300 6150,3300 6250,3300 6300,3300 6350,3300 6750,3300 6800,3300 6850,3300 5975,3350 6025,3350 6075,3350 6125,3350 6175,3350 6225,3350 6275,3350 6325,3350 6375,3350 6775,3350 6825,3350 6100,3400 6150,3400 6250,3400 6300,3400 6350,3400 6400,3400 6550,3400 6750,3400 6800,3400 6850,3400 5975,3450 6075,3450 6125,3450 6275,3450 6325,3450 6375,3450 6775,3450 6825,3450 6100,3500 6150,3500 6250,3500 6300,3500 6350,3500 6400,3500 6750,3500 6800,3500 6850,3500 6025,3550 6125,3550 6175,3550 6225,3550 6275,3550 6325,3550 6375,3550 6425,3550 6050,3600 6150,3600 6200,3600 6250,3600 6300,3600 6350,3600 6750,3600 6800,3600 6850,3600 6125,3650 6225,3650 6275,3650 6325,3650 6575,3650 6775,3650 6825,3650 6875,3650
NetC1_1: C1.1 C2.2 C3.1 L1.1 | length 594.7
  Top Layer w10: L1.1 6448,2090.03 6440,2082.03 6440,1918.54 6448.54,1910 C1.1 6468,1835 6495,1808 C2.2 6495,1597.39 6494.61,1597 C3.1
NetC1_2: C1.2 R2.1 SW1.1 | length 660.6
  Top Layer w10: R2.1 6209.53,1495 SW1.1 6295,1507 6336,1548 6395,1548 6414,1529 6464,1529 6470,1535 6470,1610 6467,1613 6467,1721 6391.46,1796.54 C1.2
NetC3_2: C3.2 C4.2 C5.1 L2.1 | length 874
  Top Layer w10: v2(6156.46,2030) C4.2 ; v2(6322,1960) L2.1 6355,1771 6445.39,1680.61 v2(6445.39,1580.73) C3.2 ; v2(6549.79,1560) C5.1
  Bottom Layer w10: v2(6156.46,2030) 6252,2030 v2(6322,1960) ; v2(6445.39,1580.73) 6466.13,1560 v2(6549.79,1560)
NetC5_2: C5.2 C6.2 C7.1 L3.1 | length 1386
  Top Layer w10: C6.2 6785.91,1247.09 6785.91,1381.09 6752,1415 6642.49,1415 6622.49,1435 L3.1 6622.49,1513 6625,1515.51 C5.2 6625,1621 6703,1699 6703,2240 6719.46,2256.46 C7.1
NetC7_2: C7.2 R1.1 | length 144
  Top Layer w10: R1.1 6895,2387 6900,2382 C7.2
NetC8_2: C8.2 C9.2 J?.5 O.4 U1.1 U2.4 U3.5 U4.1 U4.4 U4.14 U.6 | length 313.1
  Top Layer w7.87: U4.4 6755,2453.17 v2(6763,2445.17)
  Top Layer w10: v2(6074.69,3042.4) U3.5 ; U1.1 v2(6383.5,3207.64) ; C8.2 v2(6542.6,1948.53) ; C9.2 v2(6588.84,1760.75) ; v2(6637.38,1752.87) U2.4 ; O.4 v2(6637.52,2364.75) ; U4.1 v2(6678.23,2510.42) ; U4.14 v2(6678.23,2734.83)
NetJ1_1: J1.1 SW1.2 | length 391.3
  Top Layer w10: J1.1 6205,1392 6221,1408 6329,1408 6345,1424 SW1.2
NetJ2_1: J2.1 U.8 | length 1911.2
  Top Layer w10: U.8 6171.11,2663 6549,2663 6580,2632 6580,1825 6551,1796 6551,1699 6600,1650 6600,1513 6580,1493 J2.1
NetJ3_1: J3.1 L4.2 | length 454.5
  Top Layer w10: L4.2 v2(6885,3545)
  Bottom Layer w10: J3.1 v2(6885,3545)
NetJ?_1: J?.1 U2.8 U3.2 U.15 | length 2350.4
  Top Layer w4.92: U2.8 v2@6670.88,1689.88
  Top Layer w10: U3.2 5993.04,3005 5988.04,3000 5988.04,1832.98 U.15 ; v2@6670.88,1689.88 v2(6671,1690)
  Bottom Layer w10: U.15 6276.02,1676.02 6290,1690 v2(6671,1690) 6671,1564 J?.1
NetJ?_2: J?.2 U2.7 U.14 | length 898.6
  Top Layer w4.92: v2(6567.37,1705.63) 6638.48,1705.63 U2.7
  Top Layer w10: v2(6638.11,1706) v2@6638.48,1705.63
  Bottom Layer w10: U.14 6518,1755 v2(6567.37,1705.63) ; v2(6638.11,1706) 6752,1706 6768,1690 6768,1567 J?.2
NetJ?_3: J?.3 U2.1 U.13 | length 952.1
  Top Layer w4.92: v2(6637.88,1808) 6645.76,1800.12 U2.1
  Bottom Layer w10: U.13 6611.91,1833.98 v2(6637.88,1808) 6762,1808 6839,1731 6867,1731 6886,1712 6886,1631 J?.3
NetJ?_4: J?.4 U2.2 U.12 | length 937.2
  Top Layer w4.92: v2@6621.63,1784.37 U2.2
  Top Layer w10: v2(6611,1795) v2(6621,1785) v2@6621.63,1784.37
  Bottom Layer w10: U.12 6106,1873.95 6106,1817 6128,1795 v2(6611,1795) ; v2(6621,1785) 6750,1785 J?.4
NetL4_1: L4.1 U1.15 | length 492.8
  Top Layer w10: U1.15 6864,2912.36 6885,2933.36 L4.1
NetO_3: O.3 U4.3 | length 425.9
  Top Layer w7.87: 6729.41,2311.41 U4.3
  Top Layer w10: O.3 6637.52,2219.52 6729.41,2311.41
NetR1_2: R1.2 U4.5 | length 247.7
  Top Layer w7.87: U4.5 v2(6780.59,2535)
  Top Layer w10: R1.2 6920,2514.53 6924,2518.53 v2(6924,2535)
  Bottom Layer w10: v2(6780.59,2535) v2(6924,2535)
NetR3_1: R3.1 SW2.B SW2.B' | length 403.1
  Top Layer w10: SW2.B' SW2.B 6198.58,3114.42 6200,3113 R3.1
NetR4_1: R4.1 U.3 | length 132
  Top Layer w10: R4.1 6377,2613.9 6388.73,2602.17 U.3
NetR4_2: R4.2 SW3.2 | length 378.1
  Top Layer w10: R4.2 6402,2545 6465,2482 SW3.2
NetSW1_3: SW1.3 SW1.4 U.7 | length 1306.5
  Top Layer w10: U.7 6092.47,2663.34 6092.47,2364.19 6112,2344.67 6300,2344.67 6319,2325.67 6319,2161 6295,2137 SW1.4 SW1.3
NetSW2_A: SW2.A SW2.A' U1.24 | length 1236.2
  Top Layer w10: SW2.A SW2.A' 6021.42,3514 6225.42,3718 6290,3718 6614.21,3393.79 U1.24
NetSW3_1: SW3.1 U.4 | length 444.3
  Top Layer w10: SW3.1 6512,2225 6529,2242 6529,2570.53 U.4
NetSW3_3: SW3.3 SW3.4 U.1 U.2 | length 540.1
  Top Layer w10: SW3.4 SW3.3 v2(6265,2315)
  Bottom Layer w10: v2(6265,2315) 6318,2368 6451,2368 6459,2376 6459,2475.57 6447.17,2487.4 U.2 U.1
NetU4_2: U4.2 U4.6 | length 180.3
  Top Layer w7.87: v2(6703.82,2445) U4.2 ; v2(6806,2445) 6806.18,2445.18 U4.6
  Bottom Layer w10: v2(6703.82,2445) 6718.82,2460 6791,2460 v2(6806,2445)
NRST: U1.17 U3.4 | length 833.7
  Top Layer w10: U3.4 v2(6231,2967.6) ; U1.17 6867.79,3010.79 v2(6868,3011)
  Bottom Layer w10: v2(6231,2967.6) 6274.4,3011 v2(6868,3011)
SCL: D1.2 U1.5 U.10 | length 1103
  Top Layer w5.32: v2(6445,2386) D1.2
  Top Layer w10: U.10 6106.47,2517.47 6106.47,2656 6125.89,2675.42 6163,2675.42 6369.58,2882 6377.5,2882 6383.5,2888 6383.5,3004 6376.71,3010.79 U1.5
  Bottom Layer w10: U.10 6352.06,2478.94 v2(6445,2386)
SDA: D1.1 U1.6 U.11 | length 993.3
  Top Layer w5.32: 6342.77,2405 D1.1
  Top Layer w10: U.11 6337.73,2399.96 6342.77,2405 ; v2(6184,2882.58) 6263,2961.58 U1.6
  Bottom Layer w10: U.11 6106,2438.96 6106,2656 6126,2676 6160,2676 6184,2700 v2(6184,2882.58)
pads on no net: O.1 U1.3 U1.4 U1.7 U1.8 U1.9 U1.10 U1.11 U1.12 U1.13 U1.18 U1.19 U1.20 U1.21 U1.23 U1.25 U1.26 U1.27 U1.28 U2.5 U2.9 U2.10 U3.1 U4.8 U4.9 U4.10 U4.11 U4.12 U4.13

## Polygon pours and split planes (outlines as drawn)
GND on Bottom Layer "NONET_L01_P-001" (solid, remove dead copper, pour order 0): 5945,1075 6895,1075 6895,3705 6125,3705 5945,3525
GND on Top Layer "NONET_L01_P-001" (solid, remove dead copper, pour order 1): 5945,1075 6895,1075 6895,3705 6125,3705 5945,3525
GND on Int1 (GND) (split plane): 6924.9,1060.1 5920.1,1060.1 5920.1,3541.68 6123.32,3744.9 6924.9,3744.9
NetC8_2 on Int2 (PWR) (split plane): 6924.9,1060.1 5920.1,1060.1 5920.1,3541.68 6123.32,3744.9 6924.9,3744.9

## Silkscreen, mask and mechanical layers (free items; w line width, h text height)
Mechanical 1:
  lines w15: 5900,1040 6945,1040 6945,3765 6115,3765 5900,3550 5900,1100 5900,1040

## Text inside footprints (layer, text, board x,y; h text height)
U: Top Overlay "GND" at 6073.15,2569.53 h20 r180; Top Overlay "IO 1" at 6073.15,1690.35 h20 r180; Top Overlay "SDAT" at 6073.15,2406.14 h20 r180; Top Overlay "SCLK" at 6073.15,2487.83 h20 r180; Top Overlay "GND" at 6073.15,2896.3 h20 r180; Top Overlay "CLK2" at 6073.15,2651.22 h20 r180; Top Overlay "IO 5" at 6073.15,1935.43 h20 r180; Top Overlay "IO 2" at 6073.15,1772.05 h20 r180; Top Overlay "CLK1" at 6073.15,2732.91 h20 r180; Top Overlay "IO 4" at 6073.15,1853.74 h20 r180; Top Overlay "3V3" at 6073.15,2814.61 h20 r180; Top Overlay "Ext CLK Via Pads" at 6605.55,2355.87 h20 r180; Top Overlay "TCXO Out to CLK Pads" at 6636.06,2445.59 h20 r90; Top Overlay "TCXO Out to CLK Pads" at 6601.61,2746.61 h20 r180; Top Overlay "Resistor" at 6267.95,2530.24 h20 r90
U1: Top Overlay "REFDES" at 6517,3145.79 h20; Top Overlay "RefDes" at 6472,2940.79 h20; Top Overlay "*" at 6277,3335.79 h20; Mechanical 13 "RefDes2" at 6477,3010.79 h20; Mechanical 13 "*" at 6362,3212.24 h20